# EAGLE board Driver_Breakout (EAGLE 7.2.0)
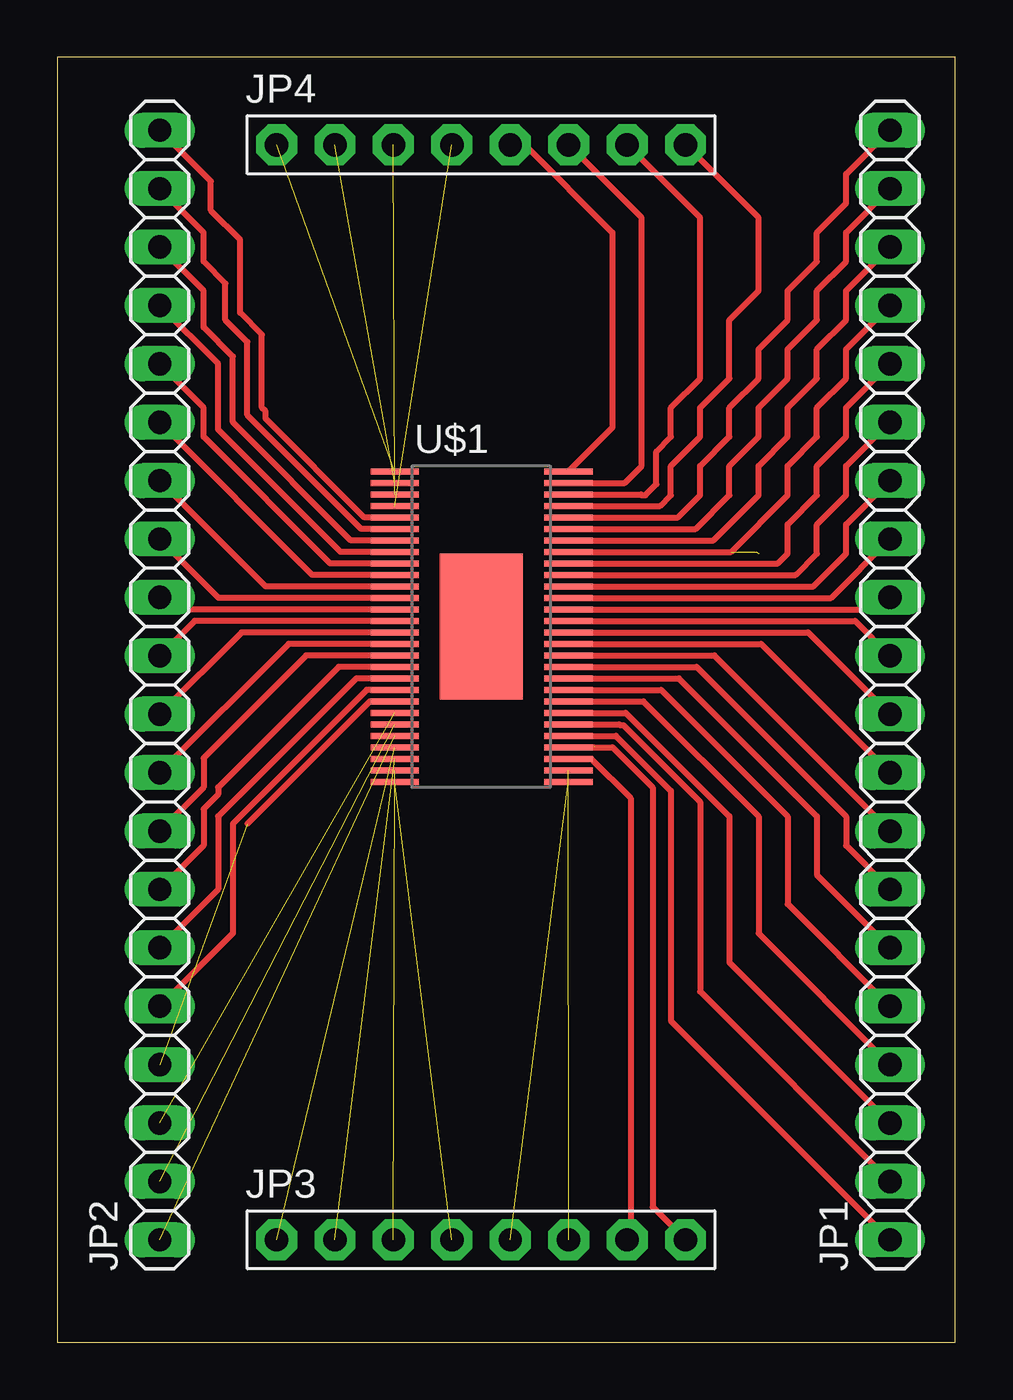
[diagram p0: board, top side]

Size 39.04 x 55.87 mm. Coordinates in mm from the lower left corner, seen from the top.
Outline: 0,0 39.04,0 39.04,55.87 0,55.87 0,0
Copper layers (1*16): Top 0.035mm / dielectric 1.5mm / Bottom 0.035mm
Design rules "default": minimum track width 10mil, minimum drill 24mil, track to track 8mil, track to pad 8mil, pad to pad 8mil, via to via 8mil, smd to smd 8mil, copper to edge 40mil, drill to drill 8mil, minimum pad ring 10mil, minimum via ring 8mil, stop-mask expansion 4mil, vias tented up to drill 0mil, thermal gap 10mil

## Footprints (pad centres in the part's own frame; a part is rotated, then mirrored left to right if it is on the bottom)
1X20 = drill 1.016 long: 1 -24.13,0; 2 -21.59,0; 3 -19.05,0; 4 -16.51,0; 5 -13.97,0; 6 -11.43,0; 7 -8.89,0; 8 -6.35,0; 9 -3.81,0; 10 -1.27,0; 11 1.27,0; 12 3.81,0; 13 6.35,0; 14 8.89,0; 15 11.43,0; 16 13.97,0; 17 16.51,0; 18 19.05,0; 19 21.59,0; 20 24.13,0
1X08-BIG = drill 1.016 pad 1.778 octagon: 1 -8.89,0; 2 -6.35,0; 3 -3.81,0; 4 -1.27,0; 5 1.27,0; 6 3.81,0; 7 6.35,0; 8 8.89,0
DRV8302 = smd 3.61 x 6.35: GND 0,0 | smd 2.1 x 0.27: P$1 -3.75,6.75; P$2 -3.75,6.25; P$3 -3.75,5.75; P$4 -3.75,5.25; P$5 -3.75,4.75; P$6 -3.75,4.25; P$7 -3.75,3.75; P$8 -3.75,3.25; P$9 -3.75,2.75; P$10 -3.75,2.25; P$11 -3.75,1.75; P$12 -3.75,1.25; P$13 -3.75,0.75; P$14 -3.75,0.25; P$15 -3.75,-0.25; P$16 -3.75,-0.75; P$17 -3.75,-1.25; P$18 -3.75,-1.75; P$19 -3.75,-2.25; P$20 -3.75,-2.75; P$21 -3.75,-3.25; P$22 -3.75,-3.75; P$23 -3.75,-4.25; P$24 -3.75,-4.75; P$25 -3.75,-5.25; P$26 -3.75,-5.75; P$27 -3.75,-6.25; P$28 -3.75,-6.75; P$29 3.8,-6.75; P$30 3.8,-6.25; P$31 3.8,-5.75; P$32 3.8,-5.25; P$33 3.8,-4.75; P$34 3.8,-4.25; P$35 3.8,-3.75; P$36 3.8,-3.25; P$37 3.8,-2.75; P$38 3.8,-2.25; P$39 3.8,-1.75; P$40 3.8,-1.25; P$41 3.8,-0.75; P$42 3.8,-0.25; P$43 3.8,0.25; P$44 3.8,0.75; P$45 3.8,1.25; P$46 3.8,1.75; P$47 3.8,2.25; P$48 3.8,2.75; P$49 3.8,3.25; P$50 3.8,3.75; P$51 3.8,4.25; P$52 3.8,4.75; P$53 3.8,5.25; P$54 3.8,5.75; P$55 3.8,6.25; P$56 3.8,6.75

## Placement (x,y rotation side)
JP1  [1X20]  36.2,28.57 90 top
JP2  [1X20]  4.45,28.57 90 top
JP3  [1X08-BIG]  18.41,4.45 0 top
JP4  [1X08-BIG]  18.41,52.07 0 top
U$1  DRV8302  [DRV8302]  18.41,31.11 0 top

## Library data of the parts
JP1-JP4 = adafruit
U$1 = bldc_lib

## Nets
N$1: JP2.20 U$1.P$5
N$2: JP2.19 U$1.P$6
N$3: JP2.18 U$1.P$7
N$4: JP2.17 U$1.P$8
N$5: JP2.16 U$1.P$9
N$6: JP2.15 U$1.P$10
N$7: JP2.14 U$1.P$11
N$8: JP2.13 U$1.P$12
N$9: JP2.12 U$1.P$13
N$10: JP2.11 U$1.P$14
N$11: JP2.10 U$1.P$15
N$12: JP2.9 U$1.P$16
N$13: JP2.8 U$1.P$17
N$14: JP2.7 U$1.P$18
N$15: JP2.6 U$1.P$19
N$16: JP2.5 U$1.P$20
N$17: JP2.4 U$1.P$21
N$18: JP2.3 U$1.P$22
N$19: JP2.2 U$1.P$23
N$20: JP2.1 U$1.P$24
N$21: JP3.1 U$1.P$25
N$22: JP3.2 U$1.P$26
N$23: JP4.1 U$1.P$1
N$24: JP4.2 U$1.P$2
N$25: JP4.4 U$1.P$4
N$26: JP4.3 U$1.P$3
N$27: JP3.3 U$1.P$27
N$28: JP3.4 U$1.P$28
N$29: JP4.5 U$1.P$56
N$30: JP4.6 U$1.P$55
N$31: JP4.7 U$1.P$54
N$32: JP4.8 U$1.P$53
N$33: JP1.20 U$1.P$52
N$34: JP1.19 U$1.P$51
N$35: JP1.18 U$1.P$50
N$36: JP1.17 U$1.P$49
N$37: JP1.16 U$1.P$48
N$38: JP1.15 U$1.P$47
N$39: JP1.14 U$1.P$46
N$40: JP1.13 U$1.P$45
N$41: JP1.12 U$1.P$44
N$42: JP1.11 U$1.P$43
N$43: JP1.10 U$1.P$42
N$44: JP1.9 U$1.P$41
N$45: JP1.8 U$1.P$40
N$46: JP1.7 U$1.P$39
N$47: JP1.6 U$1.P$38
N$48: JP1.5 U$1.P$37
N$49: JP1.4 U$1.P$36
N$50: JP1.3 U$1.P$35
N$51: JP1.2 U$1.P$34
N$52: JP1.1 U$1.P$33
N$53: JP3.8 U$1.P$32
N$54: JP3.7 U$1.P$31
N$55: JP3.6 U$1.P$30
N$56: JP3.5 U$1.P$29

## Tracks (layer width: path | path; a pad name or v marks a point on that pad's centre or on a via)
N$1
  Top 0.254: U$1.P$5 13.35,35.87 9.05,40.16 9.05,40.48 8.89,40.64 8.89,43.81 7.94,44.77 7.94,47.94 6.67,49.21 6.67,50.48 JP2.20
N$2
  Top 0.254: U$1.P$6 13.21,35.37 8.26,40.32 8.26,43.5 7.3,44.45 7.3,46.04 6.35,46.99 6.35,48.26 JP2.19
N$3
  Top 0.254: U$1.P$7 12.76,34.87 7.62,40.01 7.62,42.86 6.35,44.13 6.35,45.72 JP2.18
N$4
  Top 0.254: U$1.P$8 12.31,34.37 6.99,39.69 6.99,42.55 JP2.17
N$5
  Top 0.254: U$1.P$9 11.86,33.87 6.35,39.37 6.35,40.64 JP2.16
N$6
  Top 0.254: U$1.P$10 11.09,33.37 JP2.15
N$7
  Top 0.254: U$1.P$11 9.04,32.87 JP2.14
N$8
  Top 0.254: U$1.P$12 7,32.37 JP2.13
N$9
  Top 0.254: U$1.P$13 4.96,31.86 JP2.12
N$10
  Top 0.254: U$1.P$14 5.96,31.36 JP2.11
N$11
  Top 0.254: U$1.P$15 8.01,30.86 JP2.10
N$12
  Top 0.254: U$1.P$16 10.04,30.36 JP2.9
N$13
  Top 0.254: U$1.P$17 10.81,29.86 6.35,25.4 6.35,24.13 JP2.8
N$14
  Top 0.254: U$1.P$18 12.22,29.36 6.99,24.13 6.99,23.81 6.35,23.18 6.35,21.59 JP2.7
N$15
  Top 0.254: U$1.P$19 12.99,28.86 6.99,22.86 6.99,19.68 JP2.6
N$16
  Top 0.254: U$1.P$20 13.44,28.36 7.62,22.54 7.62,17.78 JP2.5
N$17  (1 unrouted)
  Top 0.254: U$1.P$21 13.58,27.86 8.26,22.54
N$18  (1 unrouted)
N$19  (1 unrouted)
N$20  (1 unrouted)
N$21  (1 unrouted)
N$22  (1 unrouted)
N$23  (1 unrouted)
N$24  (1 unrouted)
N$25  (1 unrouted)
N$26  (1 unrouted)
N$27  (1 unrouted)
N$28  (1 unrouted)
N$29
  Top 0.254: JP4.5 20.32,52.07 24.13,48.26 24.13,39.78 U$1.P$56
N$30
  Top 0.254: U$1.P$55 24.66,37.37 25.4,38.1 25.4,48.9 JP4.6
N$31
  Top 0.254: U$1.P$54 25.36,36.87 25.4,36.83 25.56,36.83 26.04,37.31 26.04,38.73 26.67,39.37 26.67,40.64 27.94,41.91 27.94,48.9 JP4.7
N$32
  Top 0.254: U$1.P$53 26.2,36.37 26.67,36.83 26.67,38.1 27.94,39.37 27.94,40.64 29.21,41.91 29.21,44.45 30.48,45.72 30.48,48.9 JP4.8
N$33
  Top 0.254: U$1.P$52 26.98,35.87 27.94,36.83 27.94,38.1 29.21,39.37 29.21,40.64 30.48,41.91 30.48,43.18 31.75,44.45 31.75,45.72 33.02,46.99 33.02,48.26 34.29,49.53 34.29,50.8 JP1.20
N$34
  Top 0.254: U$1.P$51 27.75,35.37 29.21,36.83 29.21,38.1 30.48,39.37 30.48,40.64 31.75,41.91 31.75,43.18 33.02,44.45 33.02,45.72 34.29,46.99 34.29,48.26 JP1.19
N$35
  Top 0.254: U$1.P$50 28.52,34.87 30.48,36.83 30.48,38.1 31.75,39.37 31.75,40.64 33.02,41.91 33.02,43.18 34.29,44.45 34.29,45.72 JP1.18
N$36  (2 unrouted)
  Top 0.254: JP1.17 34.29,43.18 34.29,41.91 33.02,40.64 33.02,39.37 31.75,38.1 31.75,36.83 29.29,34.37 U$1.P$49
N$37
  Top 0.254: U$1.P$48 31.32,33.87 31.75,34.29 31.75,35.56 33.02,36.83 33.02,38.1 34.29,39.37 34.29,40.64 JP1.16
N$38
  Top 0.254: U$1.P$47 32.09,33.37 33.02,34.29 33.02,35.56 34.29,36.83 34.29,38.1 JP1.15
N$39
  Top 0.254: U$1.P$46 32.87,32.87 34.29,34.29 34.29,35.56 JP1.14
N$40
  Top 0.254: U$1.P$45 33.63,32.37 JP1.13
N$41
  Top 0.254: U$1.P$44 35.67,31.86 JP1.12
N$42
  Top 0.254: U$1.P$43 34.67,31.36 JP1.11
N$43
  Top 0.254: U$1.P$42 32.63,30.86 JP1.10
N$44
  Top 0.254: U$1.P$41 30.59,30.36 JP1.9
N$45
  Top 0.254: U$1.P$40 28.55,29.86 JP1.8
N$46
  Top 0.254: U$1.P$39 27.79,29.36 34.29,22.86 34.29,21.59 JP1.7
N$47
  Top 0.254: U$1.P$38 27.02,28.86 33.02,22.86 33.02,20.32 JP1.6
N$48
  Top 0.254: U$1.P$37 26.25,28.36 31.75,22.86 31.75,19.05 JP1.5
N$49
  Top 0.254: U$1.P$36 25.48,27.86 30.48,22.86 30.48,17.78 JP1.4
N$50
  Top 0.254: U$1.P$35 24.7,27.36 29.21,22.86 29.21,16.51 JP1.3
N$51
  Top 0.254: U$1.P$34 24.41,26.86 24.45,26.83 24.61,26.83 27.94,23.5 27.94,15.24 JP1.2
N$52
  Top 0.254: U$1.P$33 24.28,26.36 26.67,23.97 26.67,13.97 JP1.1
N$53  (1 unrouted)
  Top 0.254: JP3.8 25.88,5.87 25.88,24.13 24.13,25.88 24.12,25.86 U$1.P$32 | 23.32,25.86 23.34,25.88
N$54
  Top 0.254: U$1.P$31 23.21,25.36 24.92,23.65 24.92,4.6 JP3.7
N$55  (1 unrouted)
N$56  (1 unrouted)